# EAGLE board vram_board (EAGLE 7.3.0)
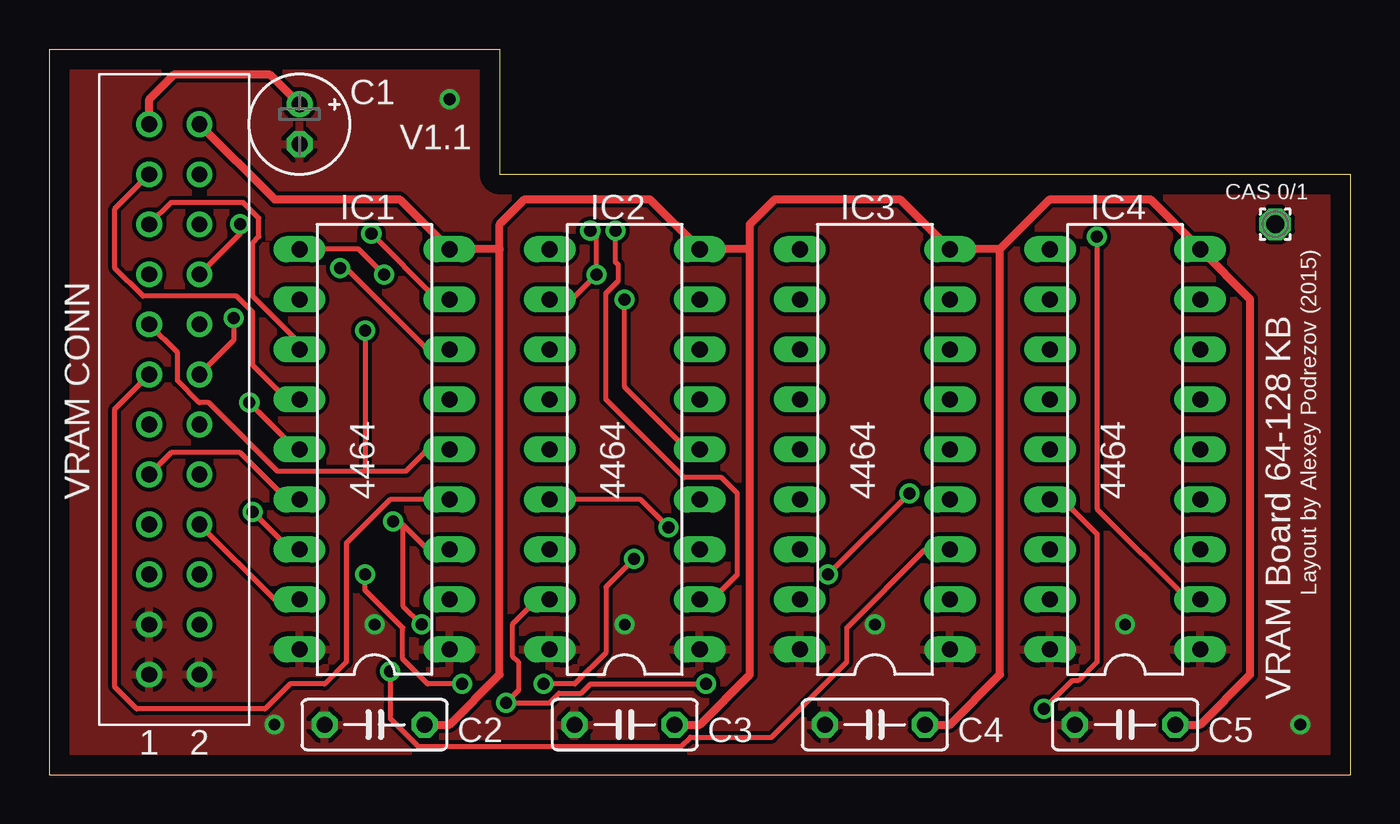
[diagram p0: board, top side]
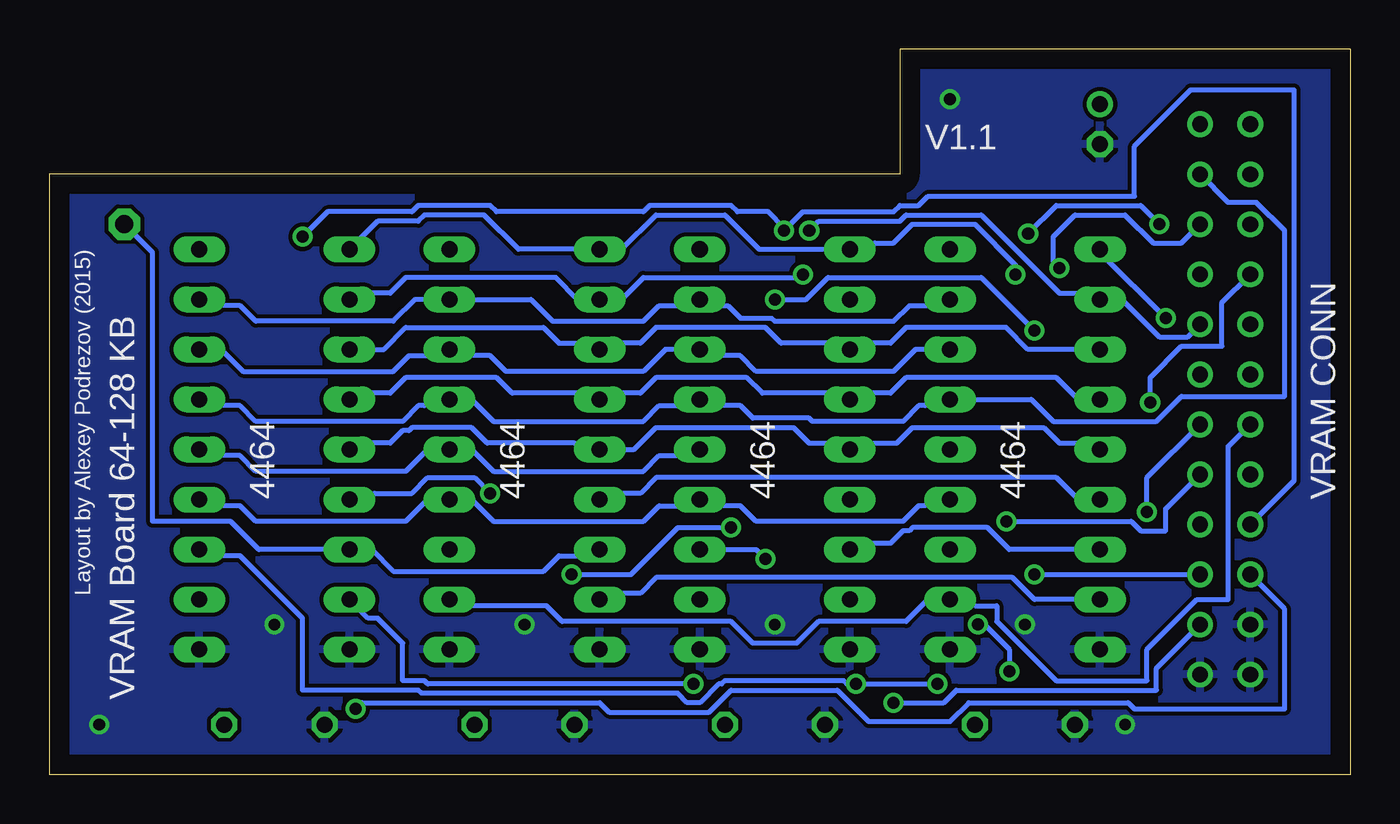
[diagram p1: board, bottom side, seen from below]

Size 66.04 x 36.83 mm. Coordinates in mm from the lower left corner, seen from the top.
Outline: 0,36.82 0,0 66.04,0 66.04,30.48 22.86,30.48 22.86,36.83 0,36.83
Copper layers (1*16): Top 0.035mm / dielectric 1.5mm / Bottom 0.035mm
Design rules "default *": minimum track width 10mil, minimum drill 24mil, track to track 8mil, track to pad 8mil, pad to pad 8mil, via to via 8mil, smd to smd 8mil, copper to edge 40mil, drill to drill 8mil, minimum pad ring 10mil, minimum via ring 8mil, stop-mask expansion 4mil, vias tented up to drill 24mil, thermal gap 10mil
Net classes: 0 default: clearance 0.205 mm

## Footprints (pad centres in the part's own frame; a part is rotated, then mirrored left to right if it is on the bottom)
E2-5 = drill 0.813 pad 1.27: + -1.016,0 | drill 0.813 pad 1.27 octagon: - 1.016,0
C050-025X075 = drill 0.813 octagon: 1 -2.54,0; 2 2.54,0
DIL18 = drill 0.813 long: 1 -10.16,-3.81; 2 -7.62,-3.81; 3 -5.08,-3.81; 4 -2.54,-3.81; 5 0,-3.81; 6 2.54,-3.81; 7 5.08,-3.81; 8 7.62,-3.81; 9 10.16,-3.81; 10 10.16,3.81; 11 7.62,3.81; 12 5.08,3.81; 13 2.54,3.81; 14 0,3.81; 15 -2.54,3.81; 16 -5.08,3.81; 17 -7.62,3.81; 18 -10.16,3.81
1,6/0,9 = drill 0.914 pad 1.6 octagon: 1 0,0
VRAM_CONN = drill 0.8: P$1 -2.54,0; P$2 0,0; P$3 -2.54,2.54; P$4 0,2.54; P$5 -2.54,5.08; P$6 0,5.08; P$7 -2.54,7.62; P$8 0,7.62; P$9 -2.54,10.16; P$10 0,10.16; P$11 -2.54,12.7; P$12 0,12.7; P$13 -2.54,15.24; P$14 0,15.24; P$15 -2.54,17.78; P$16 0,17.78; P$17 -2.54,20.32; P$18 0,20.32; P$19 -2.54,22.86; P$20 0,22.86; P$21 -2.54,25.4; P$22 0,25.4; P$23 -2.54,27.94; P$24 0,27.94

## Placement (x,y rotation side)
C1  47uF  [E2-5]  12.7,33.02 270 top
C2  100nF  [C050-025X075]  16.51,2.54 0 top
C3  100nF  [C050-025X075]  29.21,2.54 0 top
C4  100nF  [C050-025X075]  41.91,2.54 0 top
C5  100nF  [C050-025X075]  54.61,2.54 0 top
IC1  4464  [DIL18]  16.51,16.51 90 top
IC2  4464  [DIL18]  29.21,16.51 90 top
IC3  4464  [DIL18]  41.91,16.51 90 top
IC4  4464  [DIL18]  54.61,16.51 90 top
PAD1  CAS  [1,6/0,9]  62.23,27.94 0 top
U$1  CN24DR  [VRAM_CONN]  7.62,5.08 0 top

## Library data of the parts
C1-C5 = rcl
IC1-IC4 = memory-nec; OC_FARNELL: unknown; OC_NEWARK: unknown
PAD1 = wirepad
U$1 = cx5m2_vram_board

## Nets
GND: C1.- C2.1 C3.1 C4.1 C5.1 IC1.1 IC1.18 IC2.1 IC2.18 IC3.1 IC3.18 IC4.1 IC4.18 U$1.P$1 U$1.P$2 U$1.P$3
N$1: IC1.14 IC2.14 IC3.14 IC4.14 U$1.P$17
N$2: IC1.12 IC2.12 IC3.12 IC4.12 U$1.P$19
N$3: IC1.13 IC2.13 IC3.13 IC4.13 U$1.P$21
N$4: IC1.11 IC2.11 IC3.11 IC4.11 U$1.P$16
N$5: IC1.8 IC2.8 IC3.8 IC4.8 U$1.P$18
N$6: IC1.7 IC2.7 IC3.7 IC4.7 U$1.P$20
N$7: IC1.6 IC2.6 IC3.6 IC4.6 U$1.P$22
N$8: IC1.10 IC2.10 IC3.10 IC4.10 U$1.P$14
N$9: IC1.16 IC2.16 U$1.P$12
N$10: IC1.5 IC2.5 IC3.5 IC4.5 U$1.P$15
N$11: IC1.2 IC3.2 U$1.P$11
N$12: IC1.4 IC2.4 IC3.4 IC4.4 U$1.P$13
N$13: IC1.3 IC3.3 U$1.P$10
N$14: IC1.15 IC3.15 U$1.P$9
N$15: IC1.17 IC3.17 U$1.P$8
N$16: IC2.2 IC4.2 U$1.P$7
N$17: IC2.3 IC4.3 U$1.P$6
N$18: IC2.15 IC4.15 U$1.P$5
N$19: IC2.17 IC4.17 U$1.P$4
N$20: IC3.16 IC4.16 PAD1.1
VCC: C2.2 C3.2 C4.2 C5.2 IC1.9 IC2.9 IC3.9 IC4.9 U$1.P$24
VCC1: C1.+ U$1.P$23

## Tracks (layer width: path | path; a pad name or v marks a point on that pad's centre or on a via)
GND  (via drill 0.6)
  other vias: 20.32,34.29 63.5,2.54 11.43,2.54 16.51,7.62 29.21,7.62 41.91,7.62 54.61,7.62
  pour Bottom: 0,36.83 22.86,36.83 22.86,30.48 66.04,30.48 66.04,0 0,0
  pour Top: 0,36.83 22.86,36.83 22.86,30.48 66.04,30.48 66.04,0 0,0
N$1  (via drill 0.61)
  Top 0.254: v10.16,18.89 12.54,16.51 IC1.14
  Bottom 0.254: U$1.P$17 6.51,23.97 6.51,21.75 8.57,21.75 10.16,20.16 v10.16,18.89 | IC4.14 50.48,16.83 48.74,16.83 48.1,17.46 47.78,17.46 47.62,17.62 44.61,17.62 43.81,16.83 39.37,16.83 39.05,16.51 IC3.14 36.35,16.51 35.24,17.62 28.26,17.62 27.46,16.83 25.72,16.83 IC2.14 25.56,16.83 23.02,16.83 22.23,17.62 15.56,17.62 14.76,16.83 13.02,16.83 IC1.14
N$2
  Top 0.254: U$1.P$19 6.19,29.05 9.84,29.05 10.64,28.26 10.64,27.3 10.32,26.99 10.32,24.29 12.7,21.91 IC1.12
  Bottom 0.254: IC4.12 49.05,21.59 47.94,22.7 40.96,22.7 40.16,21.91 38.42,21.91 IC3.12 38.1,21.75 37.94,21.91 36.04,21.91 35.24,22.7 29.69,22.7 28.89,21.91 25.24,21.91 IC2.12 25.08,21.91 23.34,21.91 22.54,22.7 17.46,22.7 16.35,21.59 IC1.12
N$3
  Top 0.254: U$1.P$21 3.33,28.73 3.33,25.72 4.76,24.29 9.53,24.29 10.32,23.5 10.32,20.8 12.06,19.05 IC1.13
  Bottom 0.254: IC1.13 13.81,19.05 14.92,20.16 22.54,20.16 23.34,19.37 25.08,19.37 IC2.13 25.24,19.37 29.84,19.37 30.64,20.16 35.24,20.16 36.04,19.37 37.78,19.37 IC3.13 37.94,19.37 42.55,19.37 43.34,20.16 47.94,20.16 48.74,19.37 50.48,19.37 IC4.13
N$4  (via drill 0.61)
  Top 0.254: IC2.11 26.51,24.13 v27.78,25.4 27.78,27.3 v27.46,27.62
  Bottom 0.254: U$1.P$16 8.26,22.23 9.68,22.23 11.59,24.13 IC1.11 13.02,24.45 14.76,24.45 18.73,28.42 22.54,28.42 22.86,28.1 26.99,28.1 v27.46,27.62 | v27.78,25.4 27.94,25.24 35.88,25.24 36.99,24.13 IC3.11 39.21,24.13 40.32,25.24 47.94,25.24 48.74,24.45 50.48,24.45 IC4.11
N$5  (via drill 0.61)
  Top 0.254: U$1.P$18 9.68,27.46 v9.68,27.94 | v16.35,27.46 19.68,24.13 IC1.8
  Bottom 0.254: v9.68,27.94 10.64,28.89 14.92,28.89 v16.35,27.46 | IC4.8 58.1,23.81 56.36,23.81 55.56,23.02 48.58,23.02 47.47,24.13 IC3.8 41.59,24.13 40.48,23.02 35.88,23.02 35.08,23.81 33.34,23.81 IC2.8 33.18,23.81 31.59,23.81 30.96,23.18 29.37,23.18 29.21,23.02 23.18,23.02 22.38,23.81 20.64,23.81 IC1.8
N$6  (via drill 0.61)
  Top 0.254: v14.76,25.72 15.08,25.72 19.21,21.59 IC1.7
  Bottom 0.254: IC4.7 57.31,21.59 56.2,20.48 48.58,20.48 47.78,21.27 46.04,21.27 IC3.7 45.72,21.43 45.56,21.27 43.66,21.27 42.86,20.48 35.88,20.48 34.77,21.59 IC2.7 32.7,21.27 30.96,21.27 30.16,20.48 23.18,20.48 22.07,21.59 IC1.7 | U$1.P$20 8.57,26.99 10,26.99 11.43,28.42 13.97,28.42 15.08,27.3 15.08,25.72 v14.76,25.72
N$7
  Bottom 0.254: IC4.6 58.1,18.73 56.36,18.73 55.56,17.94 48.1,17.94 47.31,18.73 46.99,18.73 46.67,19.05 IC3.6 44.61,19.05 43.5,17.94 35.88,17.94 35.08,18.73 33.34,18.73 IC2.6 33.02,18.89 32.86,18.73 30.96,18.73 30.32,18.1 27.46,18.1 27.3,17.94 22.7,17.94 21.91,18.73 21.59,18.73 21.27,19.05 IC1.6 16.19,19.05 15.08,17.94 9.84,17.94 8.57,19.21 3.33,19.21 3.33,27.62 4.76,29.05 6.19,29.05 U$1.P$22
N$8  (via drill 0.61)
  Top 0.254: U$1.P$14 9.37,22.07 v9.37,23.18 | IC1.10 15.72,26.67 v16.99,25.4
  Bottom 0.254: v9.37,23.18 12.7,26.51 IC1.10 | IC4.10 49.37,28.1 47.31,28.1 46.99,28.42 43.97,28.42 42.23,26.67 IC3.10 36.99,26.67 35.24,28.42 31.75,28.42 30,26.67 IC2.10 24.45,26.67 24.13,26.99 23.18,26.99 22.23,27.94 19.05,27.94 16.99,25.88 v16.99,25.4
N$9  (via drill 0.61)
  Top 0.254: v10.32,13.34 12.22,11.43 IC1.16
  Bottom 0.254: U$1.P$12 10.32,15.08 v10.32,13.34 | IC2.16 25.08,11.75 23.34,11.75 22.7,12.38 22.38,12.38 22.23,12.54 18.41,12.54 17.3,11.43 IC1.16
N$10  (via drill 0.61)
  Top 0.254: U$1.P$15 6.51,21.43 6.51,20 7.62,18.89 8.1,18.89 11.59,15.4 16.03,15.4 | 16.03,15.4 18.1,15.4 19.21,16.51 IC1.5 | v16.03,22.54 16.03,15.4 | v29.21,24.13 29.21,19.68 32.38,16.51 IC2.5
  Bottom 0.254: IC2.5 33.34,16.19 35.08,16.19 35.88,15.4 43.5,15.4 44.61,16.51 IC3.5 46.83,16.51 47.94,15.4 55.56,15.4 56.36,16.19 58.1,16.19 IC4.5 | v16.03,22.54 18.73,25.24 26.51,25.24 27.62,24.13 v29.21,24.13
N$11
  Bottom 0.254: U$1.P$11 6.19,16.67 6.19,8.89 7.78,8.89 10.32,6.35 10.32,4.76 14.92,4.76 17.94,7.78 17.94,8.57 19.05,8.57 19.37,8.89 IC1.2 21.43,8.89 22.54,7.78 26.99,7.78 28.1,6.67 30.32,6.67 31.43,7.78 40.01,7.78 40.8,8.57 45.4,8.57 IC3.2
N$12
  Top 0.254: U$1.P$13 3.33,18.57 3.33,4.45 4.45,3.33 10.95,3.33 12.22,4.6 13.97,4.6 15.08,5.71 15.08,11.75 17.3,13.97 IC1.4
  Bottom 0.254: IC4.4 58.1,13.65 56.36,13.65 55.56,12.86 47.94,12.86 46.83,13.97 IC3.4 44.61,13.97 43.5,12.86 35.88,12.86 35.08,13.65 33.34,13.65 IC2.4 33.02,13.81 32.86,13.65 30.96,13.65 30.16,12.86 22.7,12.86 21.91,13.65 21.59,13.65 21.27,13.97 IC1.4
N$13  (via drill 0.61)
  Top 0.254: v17.46,12.86 17.78,12.86 18.02,12.62 | 18.02,12.62 19.21,11.43 IC1.3 | IC3.3 44.45,11.43 40.48,7.46 40.48,5.71 36.67,1.91 32.54,1.91 32.07,1.43 18.73,1.43 17.3,2.86 v17.3,5.24 | v18.89,7.62 17.94,8.57 17.94,12.54 18.02,12.62
  Bottom 0.254: U$1.P$10 9.37,13.49 9.37,12.38 10.64,12.38 11.11,12.86 v17.46,12.86 | v17.3,5.24 17.3,6.35 18.57,7.62 v18.89,7.62
N$14
  Top 0.254: U$1.P$9 6.19,16.35 9.68,16.35 12.06,13.97 IC1.15
  Bottom 0.254: IC3.15 37.78,14.29 36.04,14.29 35.24,15.08 14.92,15.08 13.81,13.97 IC1.15
N$15
  Top 0.254: U$1.P$8 11.43,8.89 IC1.17
  Bottom 0.254: IC3.17 37.78,9.21 36.04,9.21 35.24,10 17.14,10 16.03,8.89 IC1.17
N$16  (via drill 0.61)
  Top 0.254: v28.73,27.62 28.73,26.04 28.89,25.88 28.89,25.08 28.26,24.45 28.26,19.05 32.23,15.08 34.13,15.08 34.92,14.29 34.92,10.16 33.66,8.89 IC2.2 | IC4.2 57.78,8.89 53.18,13.49 v53.18,27.3
  Bottom 0.254: U$1.P$7 2.86,14.92 2.86,34.77 8.1,34.77 10.95,31.91 10.95,29.37 21.43,29.37 21.91,28.89 22.86,28.89 23.18,28.57 27.78,28.57 v28.73,27.62 28.73,27.78 29.53,28.57 31.11,28.57 31.43,28.89 35.56,28.89 35.88,28.57 43.34,28.57 43.66,28.89 47.31,28.89 47.62,28.57 51.91,28.57 v53.18,27.3
N$17  (via drill 0.61)
  Top 0.254: v16.03,10.16 16.03,9.37 17.94,7.46 17.94,5.87 19.21,4.6 v20.95,4.6 | v25.08,4.6 26.67,4.6 28.26,6.19 28.26,9.53 v29.69,10.95
  Bottom 0.254: v16.03,10.16 U$1.P$6 | v20.95,4.6 v25.08,4.6 25.56,4.6 25.72,4.76 31.75,4.76 31.91,4.6 32.07,4.6 33.02,3.65 33.66,3.65 34.13,4.13 47.15,4.13 47.31,4.29 53.18,4.29 53.18,7.94 56.36,11.11 58.1,11.11 IC4.3 | v29.69,10.95 30.16,11.43 IC2.3
N$18  (via drill 0.61)
  Top 0.254: v50.48,3.33 51.91,4.76 52.23,4.76 53.18,5.71 53.18,12.22 51.44,13.97 IC4.15 | IC2.15 30,13.97 v31.43,12.54 | v43.66,14.29 v39.53,10.16
  Bottom 0.254: U$1.P$5 3.33,8.41 3.33,3.33 10.95,3.33 11.27,3.65 19.37,3.65 20.32,2.7 24.45,2.7 26.04,4.29 31.43,4.29 32.54,3.17 37.62,3.17 38.1,3.65 50.16,3.65 v50.48,3.33 | v31.43,12.54 34.13,12.54 36.51,10.16 v39.53,10.16 | v43.66,14.29 44.45,15.08 46.83,15.08 47.62,14.29 49.53,14.29 49.85,13.97 IC4.15
N$19  (via drill 0.61)
  Top 0.254: IC2.17 24.77,8.89 23.5,7.62 23.5,6.03 23.81,5.71 23.81,4.29 v23.18,3.65 25.4,3.65 25.88,4.13 26.99,4.13 27.46,4.6 v33.34,4.6
  Bottom 0.254: U$1.P$4 9.84,5.4 9.84,4.29 20,4.29 20.64,3.65 v23.18,3.65 | IC4.17 49.85,7.94 49.37,7.94 48.1,6.67 48.1,4.76 46.99,4.76 46.83,4.6 v33.34,4.6
N$20
  Bottom 0.254: IC3.16 38.42,11.11 40.16,11.11 40.96,10.32 48.58,10.32 49.69,11.43 IC4.16 55.4,11.43 56.83,12.86 60.8,12.86 60.8,26.51 PAD1.1
VCC
  Top 0.406: U$1.P$24 11.43,29.21 17.78,29.21 IC1.9 22.86,26.67 | C2.2 20.32,2.54 22.86,5.08 22.86,26.67 | C3.2 33.02,2.54 35.56,5.08 35.56,26.67 | 35.56,26.67 IC2.9 30.48,29.21 24.13,29.21 22.86,27.94 22.86,26.67 | C4.2 45.72,2.54 48.26,5.08 48.26,26.67 | 48.26,26.67 IC3.9 43.18,29.21 36.83,29.21 35.56,27.94 35.56,26.67 | C5.2 58.42,2.54 60.96,5.08 60.96,24.13 IC4.9 55.88,29.21 50.8,29.21 48.26,26.67
VCC1
  Top 0.406: U$1.P$23 5.08,34.29 6.35,35.56 11.18,35.56 C1.+

## Text on the board
tNames: V1.1 | CAS 0/1 | Layout by Alexey Podrezov (2015) | VRAM CONN | 4464 | 4464 | 4464 | 4464 | VRAM Board 64-128 KB | 1 | 2
bNames: V1.1 | Layout by Alexey Podrezov (2015) | VRAM CONN | 4464 | 4464 | 4464 | 4464 | VRAM Board 64-128 KB